# EAGLE board InkTime_2D-PCB (EAGLE 9.7.0)
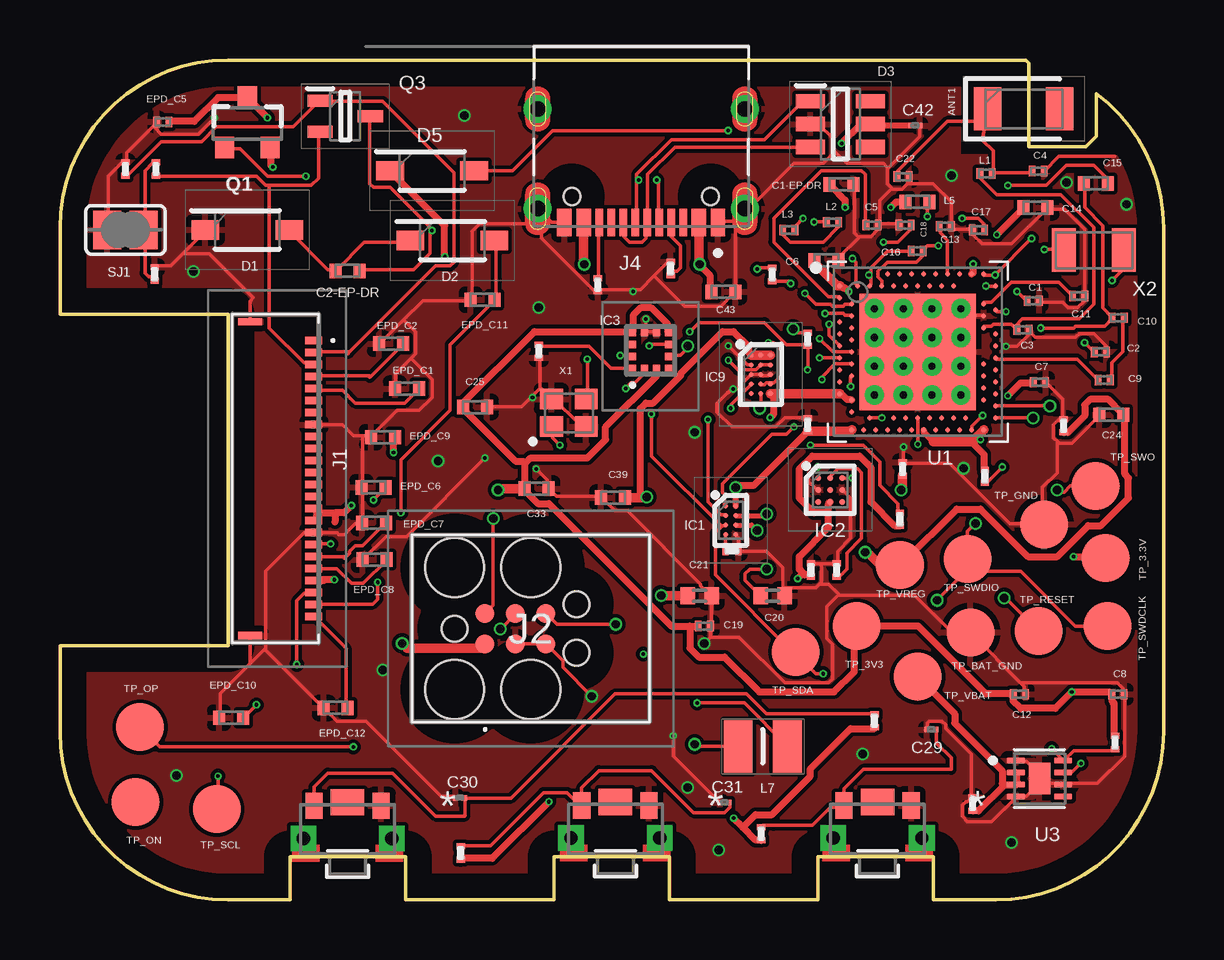
[diagram p0: board, top side]
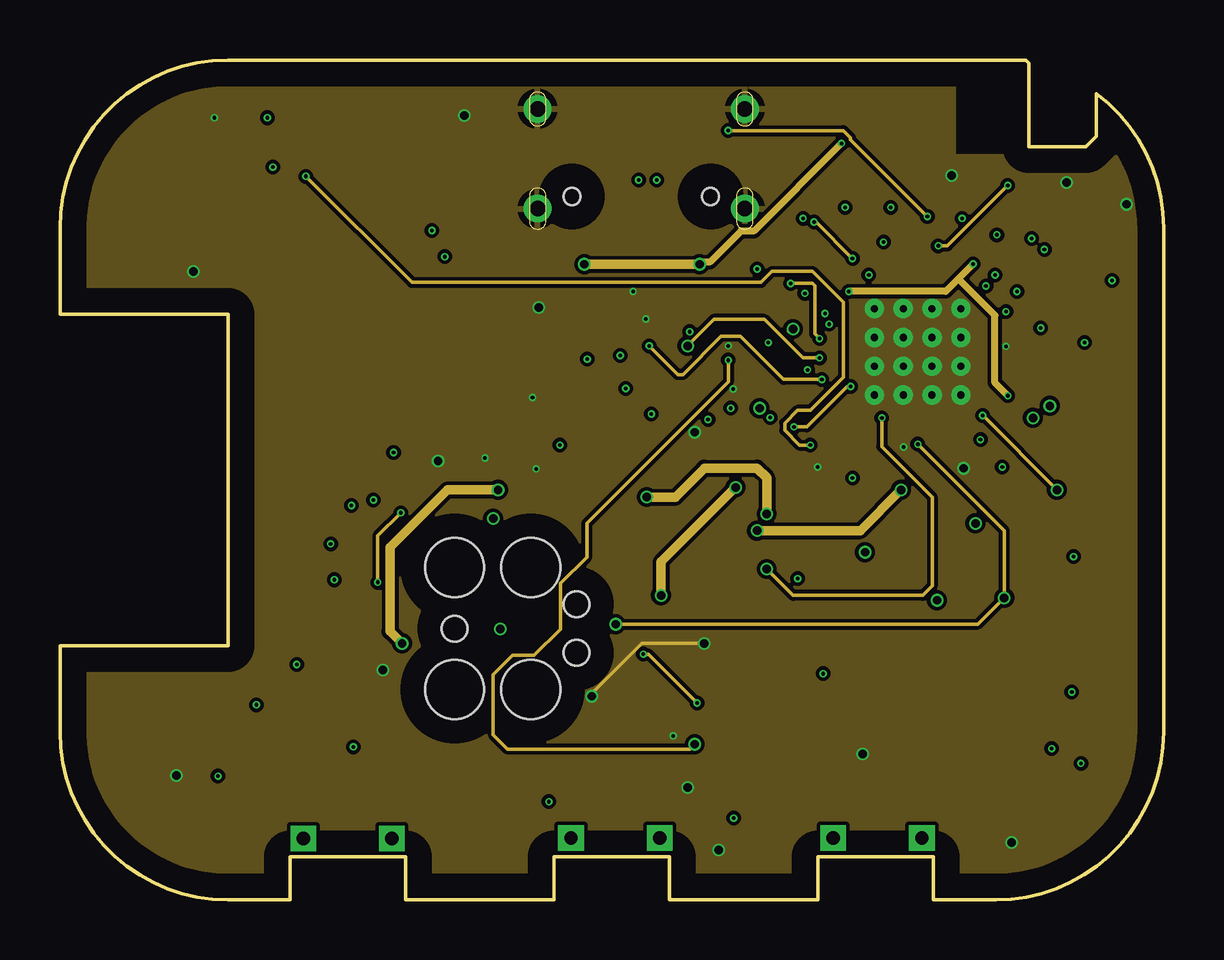
[diagram p1: board, inner layer Route2]
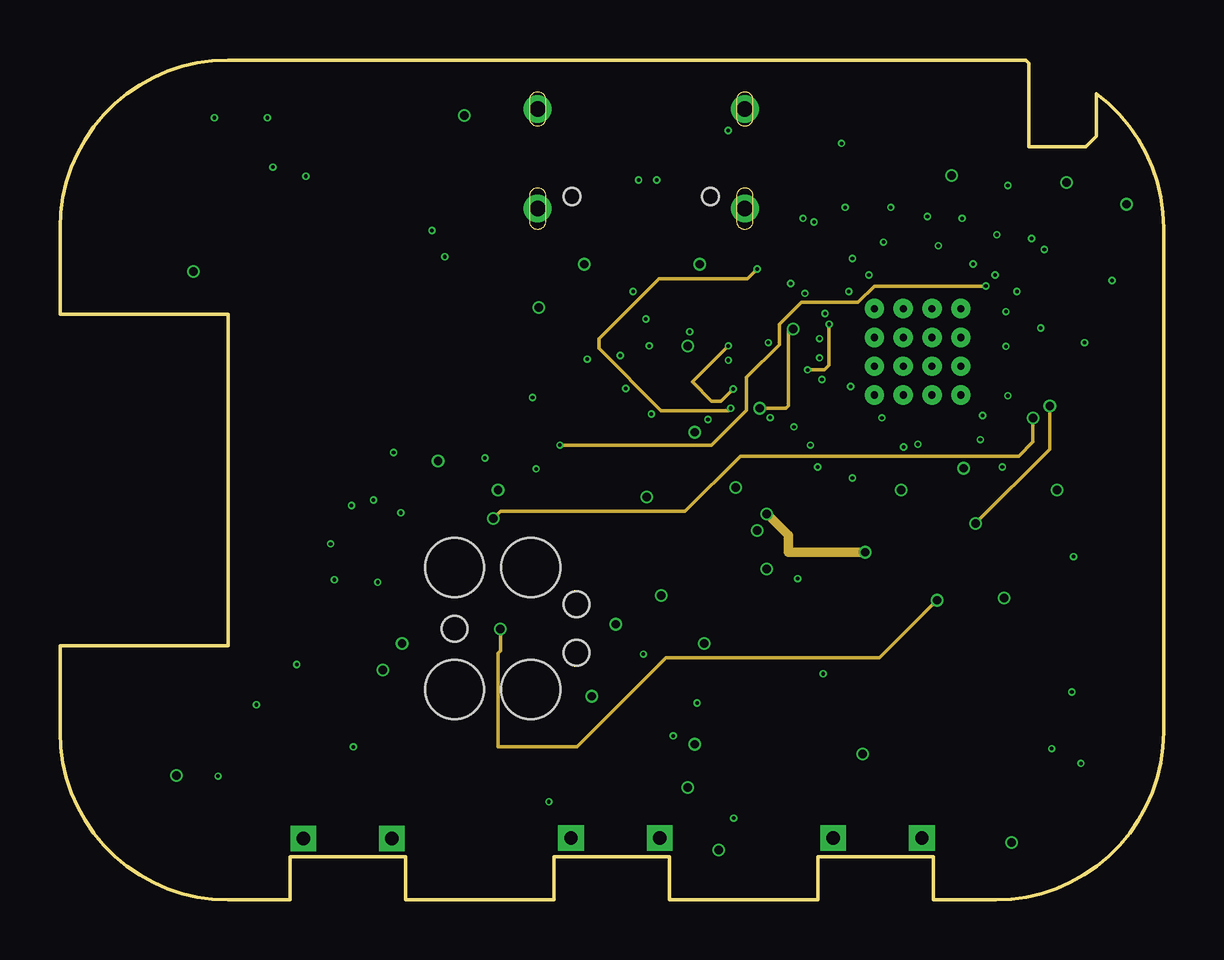
[diagram p2: board, inner layer Route15]
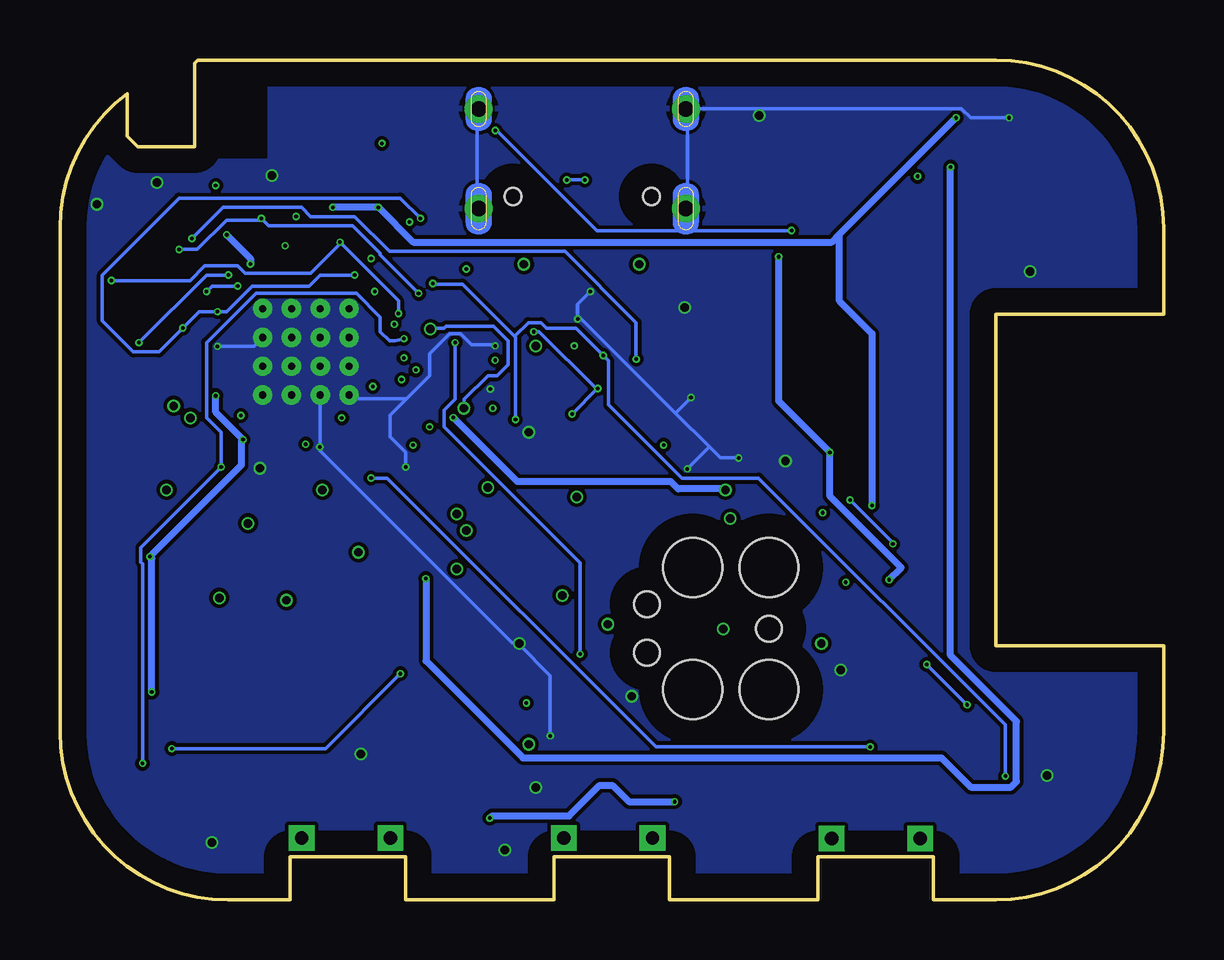
[diagram p3: board, bottom side, seen from below]

Size 46 x 35 mm. Coordinates in mm from the lower left corner, seen from the top.
Outline: 39,0 36.4,0 36.4,1.8 31.6,1.8 31.6,0 25.4,0 25.4,1.8 20.6,1.8 20.6,0 14.4,0 14.4,1.8 9.6,1.8 9.6,0 7,0 arc-90 0,7 0,10.6 7,10.6 7,24.4 0,24.4 0,28 arc-90 7,35 40.25,35 40.39,34.86 40.39,31.39 42.76,31.39 43.2,31.83 43.2,33.6 arc-53 46,28 46,7 arc-90 39,0
Copper layers (1+2*15+16): Top 0.035mm / dielectric 1.5mm / Route2 0.035mm / dielectric 0.15mm / Route15 0.035mm / dielectric 0.2mm / Bottom 0.035mm
Design rules "Fusion Electronics Design Rules *": minimum track width 6mil, minimum drill 0.15mm, track to track 6mil, track to pad 6mil, pad to pad 6mil, via to via 6mil, smd to smd 6mil, copper to edge 40mil, drill to drill 6mil, minimum pad ring 10mil, minimum via ring 0.075mm, stop-mask expansion 4mil, vias tented up to drill 9999mil, thermal gap 10mil
Net classes: 0 default: width 0.15 mm; 1 Putere: width 0.3 mm

## Footprints (pad centres in the part's own frame; a part is rotated, then mirrored left to right if it is on the bottom)
2450AT18B100E_ANTC3216X140N = smd 1.15 x 1.8: 1 -1.5,0; 2 1.5,0
NORDIC_NRF_3_RESC0201_L = smd 0.28 x 0.43: 1 -0.255,0; 2 0.255,0
NORDIC_NRF_3_RESC0402_L = smd 0.5 x 0.6: 1 -0.5,0; 2 0.5,0
PERFECT_0402_0402 = smd 0.6 x 0.7: 1 -0.5,0; 2 0.5,0
GRM011R60J152KE01L_1_0201 = smd 0.35 x 0.25: 1 0,0.275; 2 0,-0.275
GRM011R60J152KE01L_2_CAPC0201X13N = smd 0.22 x 0.23: 1 -0.185,0; 2 0.185,0
ESP32_C6_LIBRARY_5_SOD3716X135N = smd 1.15 x 0.8: 1 -1.75,0; 2 1.75,0
ESP32_C6_LIBRARY_3_SOT95P280X145-6N = smd 1.2 x 0.6: 1 -1.25,0.95; 2 -1.25,0; 3 -1.25,-0.95; 4 1.25,-0.95; 5 1.25,0; 6 1.25,0.95
BQ25180YBGR_BGA8C40P2X4_100X155X50 = smd 0.2 x 0.2: A1 -0.2,0.6; A2 0.2,0.6; B1 -0.2,0.2; B2 0.2,0.2; C1 -0.2,-0.2; C2 0.2,-0.2; D1 -0.2,-0.6; D2 0.2,-0.6
DRV2605YZFR_BGA9C50P3X3_144X144X62 = smd 0.25 x 0.25: A1 -0.5,0.5; A2 0,0.5; A3 0.5,0.5; B1 -0.5,0; B2 0,0; B3 0.5,0; C1 -0.5,-0.5; C2 0,-0.5; C3 0.5,-0.5
BMA423_BMA423 = smd 0.3 x 0.35: 1 -0.75,-0.775; 2 -0.25,-0.775; 3 0.25,-0.775; 4 0.75,-0.775; 7 0.75,0.775; 8 0.25,0.775; 9 -0.25,0.775; 10 -0.75,0.775 | smd 0.35 x 0.3: 5 0.775,-0.25; 6 0.775,0.25; 11 -0.775,0.25; 12 -0.775,-0.25
RT6160AWSC_BGA15C40P3X5_140X230X60 = smd 0.216 x 0.216: A1 -0.4,0.8; A2 0,0.8; A3 0.4,0.8; B1 -0.4,0.4; B2 0,0.4; B3 0.4,0.4; C1 -0.4,0; C2 0,0; C3 0.4,0; D1 -0.4,-0.4; D2 0,-0.4; D3 0.4,-0.4; E1 -0.4,-0.8; E2 0,-0.8; E3 0.4,-0.8
503480-2400_5034802400 = smd 0.3 x 0.7: 1 -5.75,1.525; 2 -5.25,1.525; 3 -4.75,1.525; 4 -4.25,1.525; 5 -3.75,1.525; 6 -3.25,1.525; 7 -2.75,1.525; 8 -2.25,1.525; 9 -1.75,1.525; 10 -1.25,1.525; 11 -0.75,1.525; 12 -0.25,1.525; 13 0.25,1.525; 14 0.75,1.525; 15 1.25,1.525; 16 1.75,1.525; 17 2.25,1.525; 18 2.75,1.525; 19 3.25,1.525; 20 3.75,1.525; 21 4.25,1.525; 22 4.75,1.525; 23 5.25,1.525; 24 5.75,1.525 | smd 0.3 x 1: MP1 -6.54,-1.125; MP2 6.54,-1.125
TC2030-IDC_TC2030IDC = smd 0.783 x 0.783: 1 -0.953,-0.635; 2 -0.953,0.635; 3 0.317,-0.635; 4 0.317,0.635; 5 1.588,-0.635; 6 1.588,0.635 | hole 2.451: -2.223,-2.54; -2.223,2.54; 0.952,-2.54; 0.952,2.54 | hole 1.067: -2.223,0; 2.857,-1.016; 2.857,1.016
KH-TYPE-C-16P_KINGHELM_KH-TYPE-C-16P = smd 0.6 x 1.15: A1_B12 -3.2,4.725; A4_B9 -2.4,4.725; A9_B4 2.4,4.725; A12_B1 3.2,4.725 | smd 0.3 x 1.15: A5 -1.25,4.725; A6 -0.25,4.725; A7 0.25,4.725; A8 1.25,4.725; B5 1.75,4.725; B6 0.75,4.725; B7 -0.75,4.725; B8 -1.75,4.725 | drill 0.65 pad 1.05: SH1 -4.32,0; SH2 4.32,0; SH3 -4.32,4.15; SH4 4.32,4.15 | hole 0.7: -2.89,3.65; 2.89,3.65
NORDIC_NRF_2_RESC0201_L = smd 0.28 x 0.43: 1 -0.255,0; 2 0.255,0
NORDIC_NRF_2_RESC0402_L = smd 0.5 x 0.6: 1 -0.5,0; 2 0.5,0
MLP2016SR47MT0S1_INDC2016X100N = smd 1.2 x 2.2: 1 -1.028,0; 2 1.028,0
ESP32_C6_LIBRARY_4_ESP32_C6_LIBRARY_4_ESP32_C6_LIBRARY_4_ESP32_C6_LIBRARY_4_ESP32_WROVER_SPARKFUN-DISCRETESEMI_SOT23-3 = smd 0.8 x 0.9: 1 -0.95,-1; 2 0.95,-1; 3 0,1.1
ESP32_C6_LIBRARY_6_SOT65P210X110-3N = smd 1.05 x 0.5: 1 -1.05,0.65; 2 -1.05,-0.65; 3 1.05,0
ERA-1AEB3401C_0201 = smd 0.35 x 0.25: 1 0,0.275; 2 0,-0.275
CPF0201D7K68C1_0201 = smd 0.35 x 0.25: 1 0,0.275; 2 0,-0.275
ESP32_C6_LIBRARY_7_JUMPER_SJ = smd 1.168 x 1.6: 1 -0.762,0; 2 0.762,0
2025-10-22_07-23-44_LIBRARY_SW_EVP-AKE31A_PAN = smd 0.711 x 1.092: 1 -1.4,-0.972; 2 1.4,-0.972 | drill 0.559 pad 0.914 square: 3 -1.848,0.381; 4 1.848,0.381 | smd 1.397 x 1.092: 5 0,-1.124
HECTOR_WATCH_1_TP20R = smd 2 x 2: TP 0,0
NORDIC_NRF_4_AQFN50P700X700X85_HS-74N = smd 4.85 x 4.85: P$74 0,0 | drill 0.3 pad 0.6: P$75 -1.8,1.8; P$76 -0.6,1.8; P$77 0.6,1.8; P$78 1.8,1.8; P$79 -1.8,0.6; P$80 -0.6,0.6; P$81 0.6,0.6; P$82 1.8,0.6; P$83 -1.8,-0.6; P$84 -0.6,-0.6; P$85 0.6,-0.6; P$86 1.8,-0.6; P$87 -1.8,-1.8; P$88 -0.6,-1.8; P$89 0.6,-1.8; P$90 1.8,-1.8 | smd 0.2 x 0.2: P$A8 -1.25,3.25; P$A10 -0.75,3.25; P$A12 -0.25,3.25; P$A14 0.25,3.25; P$A16 0.75,3.25; P$A18 1.25,3.25; P$A20 1.75,3.25; P$A22 2.25,3.25; P$A23 2.75,3.25; P$AA24 3.25,-2.25; P$AB2 -2.75,-2.5; P$AC5 -2,-2.75; P$AC9 -1,-2.75; P$AC11 -0.5,-2.75; P$AC13 0,-2.75; P$AC15 0.5,-2.75; P$AC17 1,-2.75; P$AC19 1.5,-2.75; P$AC21 2,-2.75; P$AC24 3.25,-2.75; P$AD2 -2.75,-3.25; P$AD4 -2.25,-3.25; P$AD6 -1.75,-3.25; P$AD8 -1.25,-3.25; P$AD10 -0.75,-3.25; P$AD12 -0.25,-3.25; P$AD14 0.25,-3.25; P$AD16 0.75,-3.25; P$AD18 1.25,-3.25; P$AD20 1.75,-3.25; P$AD22 2.25,-3.25; P$AD23 2.75,-3.25; P$B1 -3.25,2.75; P$B3 -2.5,2.75; P$B5 -2,2.75; P$B7 -1.5,2.75; P$B9 -1,2.75; P$B11 -0.5,2.75; P$B13 0,2.75; P$B15 0.5,2.75; P$B17 1,2.75; P$B19 1.5,2.75; P$B24 3.25,2.75; P$C1 -3.25,2.25; P$D2 -2.75,2; P$D23 2.75,2; P$E24 3.25,1.75; P$F2 -2.75,1.5; P$F23 2.75,1.5; P$G1 -3.25,1.25; P$H2 -2.75,1; P$H23 2.75,1; P$J1 -3.25,0.75; P$J24 3.25,0.75; P$K2 -2.75,0.5; P$L1 -3.25,0.25; P$L24 3.25,0.25; P$M2 -2.75,0; P$N1 -3.25,-0.25; P$N24 3.25,-0.25; P$P2 -2.75,-0.5; P$P23 2.75,-0.5; P$R1 -3.25,-0.75; P$R24 3.25,-0.75; P$T2 -2.75,-1; P$T23 2.75,-1; P$U1 -3.25,-1.25; P$U24 3.25,-1.25; P$V23 2.75,-1.5; P$W1 -3.25,-1.75; P$W24 3.25,-1.75; P$Y2 -2.75,-2; P$Y23 2.75,-2
ESP32_C6_LIBRARY_SON50P200X200X80-9N = smd 0.76 x 0.27: 1 -0.985,0.75; 2 -0.985,0.25; 3 -0.985,-0.25; 4 -0.985,-0.75; 5 0.985,-0.75; 6 0.985,-0.25; 7 0.985,0.25; 8 0.985,0.75 | smd 0.9 x 1.3: 9 0,0
NORDIC_NRF_BT-XTAL_2016_N = smd 0.95 x 0.85: 1 -0.725,-0.575; 2 0.725,-0.575; 3 0.725,0.575; 4 -0.725,0.575
NORDIC_NRF_1_XTAL_3215_N = smd 1 x 1.8: 1 -1.25,0; 2 1.25,0

## Placement (x,y rotation side)
ANT1  2450AT18B100E  [2450AT18B100E_ANTC3216X140N]  40.17,32.97 0 top
C1  12pF  [NORDIC_NRF_3_RESC0201_L]  40.57,24.97 0 top
C1-EP-DR  10uF  [NORDIC_NRF_3_RESC0402_L]  32.57,29.82 0 top
C2  12pF  [NORDIC_NRF_3_RESC0201_L]  43.37,22.84 0 top
C2-EP-DR  4.7uF/25V  [NORDIC_NRF_3_RESC0402_L]  11.98,26.21 0 top
C3  1pF  [NORDIC_NRF_3_RESC0201_L]  40.14,23.76 0 top
C4  1pF  [NORDIC_NRF_3_RESC0201_L]  40.77,30.37 0 top
C5  100nF  [NORDIC_NRF_3_RESC0201_L]  33.85,28.12 0 top
C6  4.7uF  [NORDIC_NRF_3_RESC0402_L]  31.94,26.65 0 top
C7  100nF  [NORDIC_NRF_3_RESC0201_L]  40.83,21.57 0 top
C8  100nF  [NORDIC_NRF_3_RESC0201_L]  44.1,8.57 0 top
C9  820pF  [NORDIC_NRF_3_RESC0201_L]  43.53,21.67 0 top
C10  N.C.  [NORDIC_NRF_3_RESC0201_L]  44.11,24.26 0 top
C11  100pF  [NORDIC_NRF_3_RESC0201_L]  42.46,25.17 0 top
C12  100nF  [NORDIC_NRF_3_RESC0201_L]  39.99,8.57 0 top
C13  N.C.  [NORDIC_NRF_3_RESC0201_L]  36.9,28.07 0 top
C14  4.7uF  [NORDIC_NRF_3_RESC0402_L]  40.67,28.85 0 top
C15  1.0uF  [NORDIC_NRF_3_RESC0402_L]  43.17,29.86 0 top
C16  47nF  [NORDIC_NRF_3_RESC0201_L]  35.73,27.04 0 top
C17  12pF  [NORDIC_NRF_3_RESC0201_L]  38.29,27.92 0 top
C18  12pF  [NORDIC_NRF_3_RESC0201_L]  35.22,28.12 0 top
C19  100nF  [NORDIC_NRF_3_RESC0201_L]  26.86,11.41 0 top
C20  4.7uF  [PERFECT_0402_0402]  29.7,12.68 0 top
C21  4.7uF  [PERFECT_0402_0402]  26.66,12.68 0 top
C22  N.C.  [NORDIC_NRF_3_RESC0201_L]  35.14,30.14 0 top
C23  0.1uF  [GRM011R60J152KE01L_1_0201]  41.83,19.76 0 top
C24  10uF  [NORDIC_NRF_3_RESC0402_L]  43.83,20.22 0 top
C25  22uF  [NORDIC_NRF_3_RESC0402_L]  17.3,20.54 0 top
C27  0.1uF  [GRM011R60J152KE01L_1_0201]  38.04,4 0 top
C29  1uF  [GRM011R60J152KE01L_2_CAPC0201X13N]  36.32,7.1 0 top
C30  1uF  [GRM011R60J152KE01L_2_CAPC0201X13N]  16.67,4.26 0 top
C31  1uF  [GRM011R60J152KE01L_2_CAPC0201X13N]  27.7,4.06 0 top
C32  1uF  [GRM011R60J152KE01L_1_0201]  32.37,13.75 0 top
C33  22uF  [NORDIC_NRF_3_RESC0402_L]  19.86,17.14 0 top
C34  0.1uF  [GRM011R60J152KE01L_1_0201]  31.3,13.75 0 top
C37  1uF  [GRM011R60J152KE01L_1_0201]  35.12,17.96 0 top
C38  1uF  [GRM011R60J152KE01L_1_0201]  31.17,19.8 0 top
C39  10uF  [NORDIC_NRF_3_RESC0402_L]  23.06,16.77 0 top
C42  0.1uF  [GRM011R60J152KE01L_2_CAPC0201X13N]  35.65,32.27 0 top
C43  4.7uF\  [NORDIC_NRF_3_RESC0402_L]  27.65,25.34 0 top
D1  MBR0530  [ESP32_C6_LIBRARY_5_SOD3716X135N]  7.81,27.92 0 top
D2  ESP32_C6_LIBRARY_5_MBR0530  [ESP32_C6_LIBRARY_5_SOD3716X135N]  16.36,27.48 0 top
D3  USBLC6-2SC6Y  [ESP32_C6_LIBRARY_3_SOT95P280X145-6N]  32.53,32.33 0 top
D5  ESP32_C6_LIBRARY_5_MBR0530  [ESP32_C6_LIBRARY_5_SOD3716X135N]  15.51,30.38 0 top
EPD_C1  1uF/50V  [NORDIC_NRF_3_RESC0402_L]  14.46,21.31 0 top
EPD_C2  1uF/50V  [NORDIC_NRF_3_RESC0402_L]  13.8,23.18 0 top
EPD_C5  0.1uF/50V  [NORDIC_NRF_3_RESC0201_L]  4.29,32.42 0 top
EPD_C6  1uF/50V  [NORDIC_NRF_3_RESC0402_L]  13.07,17.19 0 top
EPD_C7  1uF/50V  [NORDIC_NRF_3_RESC0402_L]  13.1,15.71 0 top
EPD_C8  1uF/50V  [NORDIC_NRF_3_RESC0402_L]  13.12,14.18 0 top
EPD_C9  1uF/50V  [NORDIC_NRF_3_RESC0402_L]  13.46,19.28 0 top
EPD_C10  1uF/50V  [NORDIC_NRF_3_RESC0402_L]  7.13,7.59 0 top
EPD_C11  1uF/50V  [NORDIC_NRF_3_RESC0402_L]  17.62,25.01 0 top
EPD_C12  1uF/50V  [NORDIC_NRF_3_RESC0402_L]  11.49,8 0 top
IC1  BQ25180YBGR  [BQ25180YBGR_BGA8C40P2X4_100X155X50]  27.96,15.82 0 top
IC2  DRV2605YZFR  [DRV2605YZFR_BGA9C50P3X3_144X144X62]  32.1,17.09 0 top
IC3  BMA421  [BMA423_BMA423]  24.62,22.9 0 top
IC9  RT6160AWSC  [RT6160AWSC_BGA15C40P3X5_140X230X60]  29.21,21.9 0 top
J1  503480-2400  [503480-2400_5034802400]  9.05,17.56 270 top
J2  TC2030-IDC  [TC2030-IDC_TC2030IDC]  18.67,11.31 0 top
J4  KH-TYPE-C-16P  [KH-TYPE-C-16P_KINGHELM_KH-TYPE-C-16P]  24.23,32.96 180 top
L1  3.9nH  [NORDIC_NRF_2_RESC0201_L]  38.6,30.27 0 top
L2  10uH  [NORDIC_NRF_2_RESC0201_L]  32.2,28.24 0 top
L3  15nH  [NORDIC_NRF_2_RESC0201_L]  30.38,27.92 0 top
L5  68uH  [NORDIC_NRF_2_RESC0402_L]  35.73,29.09 0 top
L7  FTC252012SR47MBCA  [MLP2016SR47MT0S1_INDC2016X100N]  29.3,6.4 0 top
Q1  20V/4.2A/52mΩ/1.4W  [ESP32_C6_LIBRARY_4_ESP32_C6_LIBRARY_4_ESP32_C6_LIBRARY_4_ESP32_C6_LIBRARY_4_ESP32_WROVER_SPARKFUN-DISCRETESEMI_SOT23-3]  7.81,32.36 0 top
Q3  ESP32_C6_LIBRARY_6_SI1308EDL-T1-GE3  [ESP32_C6_LIBRARY_6_SOT65P210X110-3N]  11.89,32.66 0 top
R1  0  [ERA-1AEB3401C_0201]  31.17,23.37 0 top
R1_EP_DR  0.47  [CPF0201D7K68C1_0201]  4,30.46 0 top
R1_USB  5K1  [CPF0201D7K68C1_0201]  25.45,26.31 0 top
R2_EP_DR  10k  [CPF0201D7K68C1_0201]  2.73,30.46 0 top
R2_USB  5K1  [CPF0201D7K68C1_0201]  22.42,25.63 0 top
R3  0  [ERA-1AEB3401C_0201]  19.96,22.86 0 top
R4  0  [ERA-1AEB3401C_0201]  29.69,26.06 0 top
R5  10k  [CPF0201D7K68C1_0201]  33.95,7.47 0 top
R7  10k  [CPF0201D7K68C1_0201]  29.23,2.76 0 top
R8  10k  [CPF0201D7K68C1_0201]  16.7,1.96 0 top
R9  10K  [ERA-1AEB3401C_0201]  28.01,14.54 270 top
R17  3k3  [ERA-1AEB3401C_0201]  38.55,17.66 0 top
R18  3K3  [ERA-1AEB3401C_0201]  43.98,6.56 0 top
R_PWR_EPD  10K  [CPF0201D7K68C1_0201]  35.01,15.86 0 top
R_TYPE_SEL  2.2  [CPF0201D7K68C1_0201]  3.95,26.08 0 top
SJ1  [ESP32_C6_LIBRARY_7_JUMPER_SJ]  2.73,27.92 0 top
SW_DN  2025-10-22_07-23-44_LIBRARY_EVP-AKE31ASW_EVP-AKE31A_PAN  [2025-10-22_07-23-44_LIBRARY_SW_EVP-AKE31A_PAN]  34.08,2.96 180 top
SW_ENT  2025-10-22_07-23-44_LIBRARY_EVP-AKE31ASW_EVP-AKE31A_PAN  [2025-10-22_07-23-44_LIBRARY_SW_EVP-AKE31A_PAN]  23.15,2.96 180 top
SW_UP  2025-10-22_07-23-44_LIBRARY_EVP-AKE31ASW_EVP-AKE31A_PAN  [2025-10-22_07-23-44_LIBRARY_SW_EVP-AKE31A_PAN]  11.99,2.95 180 top
TP_3.3V  HECTOR_WATCH_1_TPTP20R  [HECTOR_WATCH_1_TP20R]  43.59,14.25 0 top
TP_3V3  HECTOR_WATCH_1_TPTP20R  [HECTOR_WATCH_1_TP20R]  33.21,11.41 0 top
TP_BAT_GND  HECTOR_WATCH_1_TPTP20R  [HECTOR_WATCH_1_TP20R]  37.95,11.15 0 top
TP_GND  HECTOR_WATCH_1_TPTP20R  [HECTOR_WATCH_1_TP20R]  41.03,15.65 0 top
TP_ON  HECTOR_WATCH_1_TPTP20R  [HECTOR_WATCH_1_TP20R]  3.15,4.08 0 top
TP_OP  HECTOR_WATCH_1_TPTP20R  [HECTOR_WATCH_1_TP20R]  3.34,7.2 0 top
TP_RESET  HECTOR_WATCH_1_TPTP20R  [HECTOR_WATCH_1_TP20R]  40.79,11.21 0 top
TP_SCL  HECTOR_WATCH_1_TPTP20R  [HECTOR_WATCH_1_TP20R]  6.54,3.79 0 top
TP_SDA  HECTOR_WATCH_1_TPTP20R  [HECTOR_WATCH_1_TP20R]  30.67,10.34 0 top
TP_SWDCLK  HECTOR_WATCH_1_TPTP20R  [HECTOR_WATCH_1_TP20R]  43.67,11.41 0 top
TP_SWDIO  HECTOR_WATCH_1_TPTP20R  [HECTOR_WATCH_1_TP20R]  37.83,14.21 0 top
TP_SWO  HECTOR_WATCH_1_TPTP20R  [HECTOR_WATCH_1_TP20R]  43.17,17.25 0 top
TP_VBAT  HECTOR_WATCH_1_TPTP20R  [HECTOR_WATCH_1_TP20R]  35.75,9.31 0 top
TP_VREG  HECTOR_WATCH_1_TPTP20R  [HECTOR_WATCH_1_TP20R]  35.01,13.95 0 top
U1  NRF52840_QF  [NORDIC_NRF_4_AQFN50P700X700X85_HS-74N]  35.75,22.84 0 top
U3  MAX17048G+T10  [ESP32_C6_LIBRARY_SON50P200X200X80-9N]  40.83,5.06 0 top
X1  32MHz  [NORDIC_NRF_BT-XTAL_2016_N]  21.21,20.3 0 top
X2  32.768kHz  [NORDIC_NRF_1_XTAL_3215_N]  43.1,27.08 0 top

## Library data of the parts
ANT1 = InkTime_v5; ARROW_PART_NUMBER: 2450AT18B100E; ARROW_PRICE-STOCK: https://www.arrow.com/en/products/2450at18b100e/johanson-dielectrics?utm_currency=USD&region=nac; DESCRIPTION: Antennas 2.45GHz ANTENNA; HEIGHT: 1.4mm; MANUFACTURER_NAME: JOHANSON TECHNOLOGY; MANUFACTURER_PART_NUMBER: 2450AT18B100E; MOUSER_PART_NUMBER: 609-2450AT18B100E; MOUSER_PRICE-STOCK: https://www.mouser.co.uk/ProductDetail/Johanson-Technology/2450AT18B100E?qs=yCnrNFeXz%252Bh5MFsFIXGZGA%3D%3D
C1 C1-EP-DR C2 C2-EP-DR C3-C25 C27 C32-C34 C37-C39 C43 EPD_C1 EPD_C2 EPD_C5-EPD_C12 L1-L3 L5 R1 R1_EP_DR R1_USB R2_EP_DR R2_USB R3-R5 R7-R9 R17 R18 R_TYPE_SEL SJ1 TP_3.3V TP_3V3 TP_BAT_GND TP_GND TP_ON TP_OP TP_RESET TP_SCL TP_SDA TP_SWDCLK TP_SWDIO TP_SWO TP_VBAT TP_VREG U1 X1 X2 = InkTime_v5
C29-C31 C42 = InkTime_v5; AVAILABILITY: In Stock; CHECK_PRICES: https://www.snapeda.com/parts/GRM011R60J152KE01L/Murata/view-part/?ref=eda; DESCRIPTION: SMD Capacitor X5R(EIA) with Capacitance: 1500pF Tol. 10%. Rated Voltage: 6.3Vdc; MF: Murata; MP: GRM011R60J152KE01L; PACKAGE: 0201 Murata; PRICE: None; SNAPEDA_LINK: https://www.snapeda.com/parts/GRM011R60J152KE01L/Murata/view-part/?ref=snap
D1 D2 D5 = InkTime_v5; AVAILABILITY: In Stock; CHECK_PRICES: https://www.snapeda.com/parts/MBR0530/Onsemi/view-part/?ref=eda; DESCRIPTION: Diode Schottky 30 V 500mA Surface Mount SOD-123; MF: ON Semiconductor; MP: MBR0530; PACKAGE: SOD-123-2 ON Semiconductor; PRICE: None; PURCHASE-URL: https://www.snapeda.com/api/url_track_click_mouser/?unipart_id=179458&manufacturer=ON Semiconductor&part_name=MBR0530&search_term=None; SNAPEDA_LINK: https://www.snapeda.com/parts/MBR0530/Onsemi/view-part/?ref=snap
D3 = InkTime_v5; AVAILABILITY: In Stock; CHECK_PRICES: https://www.snapeda.com/parts/USBLC6-2SC6Y/STMicroelectronics/view-part/?ref=eda; DESCRIPTION: 17V Clamp 5A (8/20µs) Ipp Tvs Diode Surface Mount SOT-23-6; MF: STMicroelectronics; MP: USBLC6-2SC6Y; PACKAGE: SOT-23-6 STMicroelectronics; PRICE: None; SNAPEDA_LINK: https://www.snapeda.com/parts/USBLC6-2SC6Y/STMicroelectronics/view-part/?ref=snap
IC1 = InkTime_v5; ARROW_PART_NUMBER: BQ25180YBGR; ARROW_PRICE-STOCK: https://www.arrow.com/en/products/bq25180ybgr/texas-instruments?utm_currency=USD&region=nac; DESCRIPTION: Charger IC Lithium Ion/Polymer, Lithium Iron Phosphate 8-DSBGA (1.6x1.1); HEIGHT: 0.5mm; MANUFACTURER_NAME: Texas Instruments; MANUFACTURER_PART_NUMBER: BQ25180YBGR; MOUSER_PART_NUMBER: 595-BQ25180YBGR; MOUSER_PRICE-STOCK: https://www.mouser.co.uk/ProductDetail/Texas-Instruments/BQ25180YBGR?qs=doiCPypUmgEWjAK%252BJAX6Tw%3D%3D
IC2 = InkTime_v5; ARROW_PART_NUMBER: DRV2605YZFR; ARROW_PRICE-STOCK: https://www.arrow.com/en/products/drv2605yzfr/texas-instruments?region=nac; DESCRIPTION: Haptic Driver for ERM/LRA with Built-In Library and Smart Loop Architecture; HEIGHT: 0.625mm; MANUFACTURER_NAME: Texas Instruments; MANUFACTURER_PART_NUMBER: DRV2605YZFR
IC3 = InkTime_v5; ARROW_PART_NUMBER: BMA423; ARROW_PRICE-STOCK: https://www.arrow.com/en/products/bma423/bosch; DESCRIPTION: Accelerometers Triaxial low-g 12bit Acceleration Sensor; HEIGHT: 1mm; MANUFACTURER_NAME: BOSCH; MANUFACTURER_PART_NUMBER: BMA423; MOUSER_PART_NUMBER: 262-BMA423; MOUSER_PRICE-STOCK: https://www.mouser.co.uk/ProductDetail/Bosch-Sensortec/BMA423?qs=HXFqYaX1Q2xC%252BSgeGoX3mg%3D%3D
IC9 = InkTime_v5; DESCRIPTION: Buck-Boost Regulator Positive Output Step-Up/Step-Down I2C DC-DC Controller IC 15-WL-CSP (BSC) (1.4x2.3); HEIGHT: 0.6mm; MANUFACTURER_NAME: RICHTEK; MANUFACTURER_PART_NUMBER: RT6160AWSC; MOUSER_PART_NUMBER: 835-RT6160AWSC; MOUSER_PRICE-STOCK: https://www.mouser.co.uk/ProductDetail/Richtek/RT6160AWSC?qs=amGC7iS6iy%2FLd9PSoixZXQ%3D%3D
J1 = InkTime_v5; DESCRIPTION: FFC & FPC Connectors 0.5mm FPC RA SMT Dual Contact 24Ckt; HEIGHT: 1.87mm; MANUFACTURER_NAME: Molex; MANUFACTURER_PART_NUMBER: 503480-2400; MOUSER_PART_NUMBER: 538-503480-2400; MOUSER_PRICE-STOCK: https://www.mouser.co.uk/ProductDetail/Molex/503480-2400?qs=OAhjpuo3Vu7efIoxFh9AOw%3D%3D
J2 = InkTime_v5; DESCRIPTION: CABLE ADAPTER 6 POS; HEIGHT: 19mm; MANUFACTURER_NAME: Tag Connect; MANUFACTURER_PART_NUMBER: TC2030-IDC
J4 = InkTime_v5; AVAILABILITY: Not in stock; CHECK_PRICES: https://www.snapeda.com/parts/KH-TYPE-C-16P/Kinghelm/view-part/?ref=eda; MF: kinghelm; MP: KH-TYPE-C-16P; PACKAGE: None; PRICE: None; SNAPEDA_LINK: https://www.snapeda.com/parts/KH-TYPE-C-16P/Kinghelm/view-part/?ref=snap
L7 = InkTime_v5; DESCRIPTION: SMD / SMT Inductors (Coils), L=0.47?H, L x W x T :; HEIGHT: 1mm; JLCPCB: https://jlcpcb.com/partdetail/6763488-FTC252012SR47MBCA/C5832368; MANUFACTURER_NAME: TDK; MANUFACTURER_PART_NUMBER: FTC252012SR47MBCA
Q1 = Libraria_DANI; PROD_ID: TRAN-14388
Q3 = InkTime_v5; AVAILABILITY: In Stock; CHECK_PRICES: https://www.snapeda.com/parts/SI1308EDL-T1-GE3/Vishay+Siliconix/view-part/?ref=eda; DESCRIPTION: Si1308EDL-T1-GE3 N-channel MOSFET Transistor, 1.5 A, 30 V, 3-Pin SC-70 | Siliconix / Vishay SI1308EDL-T1-GE3; MF: Vishay Siliconix; MP: SI1308EDL-T1-GE3; PACKAGE: SOT-323 Vishay Semiconductor; PRICE: None; PURCHASE-URL: https://www.snapeda.com/api/url_track_click_mouser/?unipart_id=274603&manufacturer=Vishay Siliconix&part_name=SI1308EDL-T1-GE3&search_term=None; SNAPEDA_LINK: https://www.snapeda.com/parts/SI1308EDL-T1-GE3/Vishay+Siliconix/view-part/?ref=snap
R_PWR_EPD = Libraria_DANI
SW_DN SW_ENT SW_UP = InkTime_v5; COPYRIGHT: Copyright (C) 2025 Ultra Librarian. All rights reserved.; DIGI-KEY_PART_NUMBER_1: P123437TR-ND; DIGI-KEY_PART_NUMBER_2: P123437CT-ND; DIGI-KEY_PART_NUMBER_3: P123437DKR-ND; MANUFACTURER_NAME: Panasonic; MANUFACTURER_PART_NUMBER: EVP-AKE31A
U3 = InkTime_v5; AVAILABILITY: In Stock; CHECK_PRICES: https://www.snapeda.com/parts/MAX17048G+T10/Analog+Devices/view-part/?ref=eda; DESCRIPTION: 3µA 1-Cell/2-Cell Fuel Gauge with ModelGauge; MF: Analog Devices; MP: MAX17048G+T10; PACKAGE: TDFN-8 Maxim; PRICE: None; PURCHASE-URL: https://www.snapeda.com/api/url_track_click_mouser/?unipart_id=329239&manufacturer=Analog Devices&part_name=MAX17048G+T10&search_term=None; SNAPEDA_LINK: https://www.snapeda.com/parts/MAX17048G+T10/Analog+Devices/view-part/?ref=snap

## Nets
3V3/1.7D [Putere]: C34.2 IC2.C2 Q1.2 R_PWR_EPD.2
3V3/1.7D1 [Putere]: R5.2 R7.2 R8.2
3V3/2.4A [Putere]: C6.1 C7.1 C8.1 C12.1 C14.1 C19.1 C25.1 C33.1 IC3.3 IC3.7 IC3.10 IC9.E3 J2.1 R17.1 R18.1 TP_3.3V.TP TP_3V3.TP U1.P$A22 U1.P$AD14 U1.P$AD23 U1.P$B1 U1.P$W1 U1.P$Y2
ALERT/1.6C: U3.5
ALERT/2.5C: U1.P$J24
D+/1.5D: D3.4
D+/2.7D: U1.P$AD6
D-/1.5D: D3.6
D-/2.7D: U1.P$AD4
DEC1: C5.1 U1.P$C1
DEC3: C11.1 U1.P$D23
DEC4_6: C10.1 C15.1 C16.1 L3.2 U1.P$B5 U1.P$E24
DN: D3.1 J4.A7 J4.B7
DP: D3.3 J4.A6 J4.B6
EPD_3V3 [Putere]: C1-EP-DR.1 EPD_C5.2 J1.15 J1.16 L5.1 Q1.3
EPD_BUSY/1.5D: J1.9
EPD_BUSY/2.2D: U1.P$AD12
EPD_CS/1.4C: J1.12
EPD_CS/2.2D: U1.P$K2
EPD_DC/1.5D: J1.11
EPD_DC/2.2D: U1.P$AD10
EPD_RST/1.5D: J1.10
EPD_RST/2.2D: U1.P$AC11
GDR: J1.2 Q3.1 R2_EP_DR.2
GND: C1-EP-DR.2 C1.2 C2.2 C3.2 C4.2 C5.2 C6.2 C7.2 C8.2 C11.2 C12.2 C13.2 C14.2 C17.1 C18.1 C19.2 C20.2 C21.2 C22.2 C23.1 C24.1 C25.2 C27.1 C29.1 C30.1 C31.1 C32.1 C33.2 C34.1 C37.1 C38.1 C39.1 C42.2 C43.2 D1.1 D3.2 EPD_C1.1 EPD_C2.1 EPD_C5.1 EPD_C6.1 EPD_C7.1 EPD_C8.1 EPD_C9.1 EPD_C10.1 EPD_C11.1 EPD_C12.1 IC1.D2 IC2.B1 IC2.B3 IC3.8 IC3.9 IC9.B1 IC9.C1 IC9.C2 IC9.C3 J1.8 J1.17 J1.MP1 J1.MP2 J2.3 J2.5 J4.A1_B12 J4.A12_B1 J4.SH1 J4.SH2 J4.SH3 J4.SH4 R1_USB.1 R2_EP_DR.1 R2_USB.2 R3.2 R9.1 R_TYPE_SEL.1 SJ1.1 SW_DN.1 SW_ENT.1 SW_UP.1 TP_BAT_GND.TP TP_GND.TP U1.P$74 U1.P$75 U1.P$76 U1.P$77 U1.P$78 U1.P$79 U1.P$80 U1.P$81 U1.P$82 U1.P$83 U1.P$84 U1.P$85 U1.P$86 U1.P$87 U1.P$88 U1.P$89 U1.P$90 U1.P$F23 U3.1 U3.4 U3.6 U3.9 X1.2 X1.4
HAPTIC_EN/1.4C: IC2.A1
HAPTIC_EN/2.6A: U1.P$U1
IMU_INT1: IC3.5 U1.P$N1
IMU_INT2: IC3.6 U1.P$P2
LX1: IC9.B2 IC9.B3 L7.1
LX2: IC9.D2 IC9.D3 L7.2
MOSI/1.5B: J1.14
MOSI/2.2D: U1.P$B13
N$1: C20.1 U1.P$AC5
N$2: C9.1 U1.P$N24
N$3: C13.1 U1.P$A18
N$4: L2.2 L3.1
N$5: C15.2 C16.2 U1.P$B7
N$6: L2.1 U1.P$B3
N$7: C3.1 L1.1 U1.P$H23
N$8: C2.1 U1.P$A23 X1.3
N$9: C1.1 U1.P$B24 X1.1
N$10: EPD_C2.2 J1.4
N$11: IC9.D1 R4.1
N$12: EPD_C10.2 J1.22
N$13: IC9.E2 R1.1
N$14: EPD_C1.2 J1.5
N$15: IC1.D1 R9.2
N$16: IC3.1 R3.1
N$17: EPD_C6.2 J1.18
N$20: EPD_C7.2 J1.19
N$21: EPD_C12.2 J1.24
N$22: EPD_C8.2 J1.20
N$23: C32.2 IC2.A2
N$25: C2-EP-DR.2 D5.2 L5.2 Q3.3
N$27: C2-EP-DR.1 D1.2 D2.1
N$28: R1_EP_DR.1 R_TYPE_SEL.2 SJ1.2
N$30: J4.A5 R1_USB.2
N$31: J4.B5 R2_USB.1
N.C.: C9.2 C10.2
OUT: IC2.C3
OUT+: IC2.A3 TP_OP.TP
OUT-: TP_ON.TP
P0.00/XL1: C17.2 U1.P$D2 X2.1
P0.01/XL2: C18.2 U1.P$F2 X2.2
P0.04: U1.P$J1
P0.09: U1.P$L24
P0.13/1.5D: C30.2 R5.1 SW_UP.2
P0.13/2.6C: U1.P$AD8
P0.14/1.5D: C31.2 R8.1 SW_ENT.2
P0.14/2.7C: U1.P$AC9
P0.19: U1.P$AC15
P0.20: U1.P$AD16
P0.21: U1.P$AC17
P0.22: U1.P$AD18
P0.23: U1.P$AC19
P0.24: U1.P$AD20
P0.25: U1.P$AC21
P0.26: U1.P$G1
P0.27: U1.P$H2
P0.28: U1.P$B11
P0.29: U1.P$A10
P0.30: U1.P$B9
P0.31: U1.P$A8
P1.01/1.6C: Q1.1 R_PWR_EPD.1
P1.01/2.4B: U1.P$Y23
P1.02/1.6C: C29.2 R7.1 SW_DN.2
P1.02/2.8C: U1.P$W24
P1.03: U1.P$V23
P1.04: U1.P$U24
P1.05: U1.P$T23
P1.06: U1.P$R24
P1.07: U1.P$P23
P1.09: U1.P$R1
P1.10: U1.P$A20
P1.11: U1.P$B19
P1.12: U1.P$B17
P1.13: U1.P$A16
P1.14: U1.P$B15
P1.15: U1.P$A14
PMIC_INT: IC1.A1 U1.P$T2
PREVGH [Putere]: D5.1 EPD_C9.2 J1.21
PREVGL: D2.2 EPD_C11.2 J1.23
RESE: J1.3 Q3.2 R1_EP_DR.2
RESET: J2.6 TP_RESET.TP U1.P$AC13
RF: ANT1.1 C4.1 C22.1 L1.2
SCK/1.5B: J1.13
SCK/2.2D: U1.P$A12
SCL/1.4C: IC2.C1
SCL/2.4C: IC1.B1 IC3.12 R4.2 R17.2 TP_SCL.TP U1.P$M2 U3.7
SDA/1.4C: IC2.B2
SDA/2.4C: IC1.C1 IC3.2 R1.2 R18.2 TP_SDA.TP U1.P$L1 U3.8
SWDCLK: J2.4 TP_SWDCLK.TP TP_SWDIO.TP U1.P$AA24
SWDIO: J2.2 U1.P$AC24
SWO: TP_SWO.TP U1.P$AD22
VBAT/1.2A [Putere]: C27.2 TP_VBAT.TP U3.2 U3.3
VBAT/2.5C [Putere]: C37.2 IC1.C2
VBUS/1.5D [Putere]: C42.1 C43.1 D3.5 J4.A4_B9 J4.A9_B4
VBUS/2.6D [Putere]: C21.1 C38.2 IC1.A2 U1.P$AD2
VREG [Putere]: C23.2 C24.2 C39.2 IC1.B2 IC9.A1 IC9.A2 IC9.A3 TP_VREG.TP

## Tracks (layer width: path | path; a pad name or v marks a point on that pad's centre or on a via)
3V3/1.7D  (via drill 0.15)
  Top 0.3: 32.04,16.13 32.04,15.52 30.82,14.31 30.82,13.77 30.97,13.62 | 32.04,16.13 32.04,16.52 IC2.C2 | 30.97,13.62 31.05,13.54 31.28,13.54 C34.2 | 32.04,16.13 31.43,16.13 30.82,16.74 30.82,17.96 31.36,18.5 33.34,18.5 33.79,18.04 33.79,16.59 34.78,15.6 34.94,15.6 R_PWR_EPD.2 | v8.88,30.54 8.8,30.61 8.8,31.3 Q1.2 | 30.97,13.62 v30.75,13.39
  Bottom 0.3: v8.88,30.54 8.88,10.19 6.13,7.45 6.13,4.93 6.36,4.7 8.04,4.7 9.26,5.92 26.71,5.92 30.75,9.96 v30.75,13.39
3V3/1.7D1  (via drill 0.15)
  Top 0.3: v20.38,4.09 18.02,1.73 16.72,1.73 R8.2 | 28.46,3.03 28.99,2.49 29.22,2.49 R7.2 | 28.46,3.03 v28.08,3.41 | 28.46,3.03 28.99,3.56 29.68,3.56 31.28,5.16 31.28,5.47 32.96,7.14 33.95,7.14 R5.2
  Bottom 0.3: v20.38,4.09 22.29,4.09 22.97,4.78 23.51,4.78 24.78,3.51 27.98,3.51 v28.08,3.41
3V3/2.4A  (via drill 0.15, 0.35)
  Top 0.254: 36.4,19.09 36,19.49 U1.P$AD14
  Top 0.3: v38.06,26.5 38.06,26.12 U1.P$A22 | v39.05,27.72 40.12,28.78 C14.1 | v32.88,25.36 32.73,25.51 32.65,25.51 U1.P$B1 | R17.1 38.52,17.96 38.52,18.57 38.14,18.95 38,19.09 | v39.51,21.01 40.04,21.55 40.5,21.55 C7.1 | v38.37,19.18 38.23,19.32 | v42.25,14.31 43.55,14.31 TP_3.3V.TP | R18.1 43.93,6.84 43.93,8.21 43.85,8.29 43.85,8.51 C8.1 43.75,8.67 v42.18,8.67 41.49,7.98 40.04,7.98 39.74,8.29 39.74,8.51 C12.1 39.58,8.59 38.59,8.59 35.77,11.41 TP_3V3.TP 33.11,11.33 33.11,9.5 32.27,8.67 29.15,8.67 27.7,10.11 26.63,10.11 26.25,10.5 26.25,11.41 | IC3.7 25.34,23.68 25.34,23.98 24.65,24.67 24.19,24.67 23.89,24.36 23.89,23.68 IC3.10 23.74,23.68 19.77,23.68 16.72,20.63 C25.1 16.8,20.48 19.01,18.27 19.32,18.27 19.39,18.19 | U1.P$Y2 32.96,20.86 32.8,20.86 32.65,21.01 U1.P$W1 | 19.39,18.19 19.62,18.42 21.98,18.42 22.74,19.18 22.74,19.72 24.88,21.85 24.88,22.08 IC3.3 | 19.39,18.19 19.39,17.28 C33.1 19.47,16.97 19.93,16.52 20.38,16.52 25.49,11.41 26.25,11.41 | 26.25,11.41 C19.1 | 29.76,21.1 29.76,20.25 v29.6,20.1
  Top 0.4: J2.1 17.53,10.49 14.46,10.49 v14.26,10.69 | C33.1 18.31,17.14 v18.26,17.09 | U1.P$B1 32.4,25.59 31.44,26.55 C6.1 | 36.4,19.09 38,19.09 38.23,19.32 U1.P$AD23 | IC9.E3 29.76,21.1 U1.P$W1
  Route2 0.3: v32.88,25.36 36.92,25.36 37.45,25.89 | v38.06,26.5 37.45,25.89 | 37.45,25.89 38.98,24.36 38.98,21.55 v39.51,21.01
  Route2 0.4: v14.26,10.69 13.76,11.19 13.76,14.69 16.16,17.09 v18.26,17.09
  Bottom 0.3: v38.06,26.5 38.06,26.73 v39.05,27.72 | v39.51,21.01 39.51,20.33 v38.37,19.18 38.44,19.11 38.44,18.12 v42.25,14.31 42.18,14.23 v42.18,8.67 | v29.6,20.1 26.94,17.43 20.53,17.43 20.23,17.12 18.33,17.12 v18.26,17.09
DEC1
  Top 0.152: U1.P$C1 32.5,25.13 32.04,25.13 29.76,27.41 29.76,28.4 31.74,30.38 33.41,30.38 33.57,30.23 33.57,28.17 C5.1
DEC3
  Top 0.152: U1.P$D23 38.52,24.9 38.82,24.9 39.66,25.74 41.64,25.74 42.18,25.2 C11.1
DEC4_6  (via drill 0.15)
  Top 0.152: 33.79,26.04 33.79,26.34 34.48,27.03 C16.1 | 33.79,26.04 33.79,25.66 U1.P$B5 | v39.43,24.52 39.05,24.52 U1.P$E24 | v40.88,23.83 42.25,23.83 42.33,23.91 43.55,23.91 43.85,24.21 C10.1 43.85,24.29 43.47,24.67 43.47,28.1 42.71,28.86 42.71,29.8 C15.1 | v30.97,28.4 30.67,28.1 30.67,27.95 L3.2 | v33.72,26.04 33.79,26.04
  Bottom 0.152: v30.97,28.4 31.81,29.24 41.03,29.24 44.23,26.04 44.23,24.14 42.94,22.84 41.87,22.84 v40.88,23.83 40.19,24.52 v39.43,24.52 39.05,24.52 37.98,25.58 35.62,25.58 35.17,26.04 v33.72,26.04
DN  (via drill 0.15)
  Top 0.152: 24.04,30 24.04,30.23 25.49,31.68 29.38,31.68 30.97,33.28 D3.1 | 24.04,30 24.04,28.25 J4.A7 | v24.88,30 24.95,29.93 24.95,28.25 J4.B7 | 24.04,30 v24.12,30
  Bottom 0.152: v24.12,30 v24.88,30
DP
  Top 0.152: J4.B6 23.51,28.17 23.51,27.64 23.74,27.41 24.27,27.41 24.42,27.56 24.42,28.17 J4.A6 24.5,28.25 24.5,30.23 25.64,31.37 D3.3
EPD_3V3  (via drill 0.15)
  Top 0.3: EPD_C5.2 4.61,32.44 5.6,32.44 6.59,33.43 7.81,33.43 Q1.3 7.89,33.36 v8.65,32.59 | 11.47,16.13 11.47,15.75 | J1.15 10.66,16.22 10.78,16.13 | v34.63,28.86 34.86,29.09 35.17,29.09 L5.1 | v32.73,28.86 32.73,29.17 32.12,29.77 C1-EP-DR.1 | v12.15,16.44 11.85,16.13 11.47,16.13 | 10.78,16.13 11.47,16.13 | 10.78,16.13 10.71,16.06 10.71,15.91 10.63,15.83 J1.16
  Bottom 0.3: v34.63,28.86 v32.73,28.86 31.28,27.41 13.83,27.41 13.5,27.74 | v12.15,16.44 12.15,23.6 13.5,24.95 13.5,27.74 | 13.5,27.74 v8.65,32.59
GDR
  Top 0.152: R2_EP_DR.2 2.78,30.23 2.86,30.23 4.23,31.6 5.9,31.6 6.51,32.21 9.71,32.21 10.78,33.28 Q3.1 10.86,33.28 13.45,33.28 16.42,30.31 16.42,26.57 16.27,26.42 15.66,26.42 12.04,22.8 | 12.04,22.8 12,22.76 | J1.2 10.63,22.84 12,22.84 12.04,22.8
GND  (via drill 0.15, 0.35)
  Top 0.152: J2.3 J2.5 20.96,9.97 20.96,9.69 v22.16,8.49 | J4.A1_B12 27.48,28.29 28.16,28.29 | 28.16,28.29 28.36,28.29 28.38,28.33 28.38,28.55 28.61,28.78 J4.SH3 28.69,28.78 30.59,30.69 31.81,30.69 32.31,31.18 | J4.A12_B1 20.48,28.23 J4.SH4 20.08,28.55 20.08,28.17 | IC9.B1 28.65,22.3 v27.86,23.09 | 27.11,10.94 C19.2 27.16,11.41 27.16,12.63 C21.2 27.09,12.7 26.71,13.09 26.71,13.16 23.66,16.21 23.13,16.21 22.59,16.74 C39.1 22.52,16.82 20.69,16.82 20.38,17.12 C33.2 20.31,17.2 20.31,17.51 v19.85,17.96 | 27.11,10.94 v26.86,10.69 | IC1.D2 28.28,15.09 R9.1 28.31,14.53 29.45,14.53 30.14,13.85 30.14,13.01 | C7.2 41.11,21.55 41.8,20.86 41.8,20.1 C23.1 41.72,20.1 41.41,19.79 41.41,19.26 41.6,19.07 | 41.6,19.07 41.64,19.03 42.18,19.03 43.32,20.17 C24.1 | 41.6,19.07 41.57,19.03 41.57,17.81 40.96,17.2 40.96,15.75 TP_GND.TP 40.96,15.68 39.58,15.68 37.07,18.19 35.17,18.19 C37.1 35.17,18.27 v35.17,18.88 | C38.1 31.13,20.1 30.21,20.1 29.83,19.72 28,19.72 27.39,20.33 27.39,20.71 27.81,21.13 v28.06,21.29 28.2,21.29 IC9.C1 IC9.C2 29.22,21.85 29.53,21.85 29.6,21.93 IC9.C3 | v31.58,18.04 31.51,18.04 31.2,17.73 31.2,17.43 31.51,17.12 31.58,17.12 IC2.B1 | C2.2 43.62,23.07 43.09,23.6 42.48,23.6 42.33,23.45 40.65,23.45 40.42,23.68 40.42,23.75 C3.2 40.42,23.6 39.89,23.07 v39.43,23.07 | U1.P$F23 38.44,24.36 37.83,24.36 37.6,24.59 U1.P$74 | 34.02,21.09 35.09,21.09 U1.P$88 | U1.P$83 34.02,22.23 34.56,21.7 U1.P$74 | U1.P$84 35.17,22.23 U1.P$74 | 36.38,22.23 36.38,21.09 U1.P$89 36.46,21.09 37.53,21.09 U1.P$90 | 36.38,22.23 U1.P$85 36.46,22.23 37.53,22.23 U1.P$86 | 36.38,22.23 U1.P$74
  Top 0.152: U1.P$79 34.02,23.45 35.09,23.45 U1.P$74 | U1.P$80 35.17,23.45 U1.P$74 | U1.P$81 36.38,23.45 U1.P$74 | U1.P$75 34.02,24.67 35.09,24.67 U1.P$74 | 36.99,23.98 37.53,23.45 U1.P$82 | U1.P$76 35.17,24.67 U1.P$74 | 36.99,23.98 36.38,24.59 U1.P$77 | 36.99,23.98 U1.P$74 | U1.P$78 37.6,24.67 U1.P$74 | 34.02,21.09 U1.P$87 | 34.02,21.09 U1.P$74 | C31.1 27.47,4.09 25.56,6 v25.56,6.84 | U3.9 41.03,4.86 41.8,4.86 U3.6 41.87,4.86 43.24,4.86 44.39,6 44.39,8.51 C8.2 44.31,8.59 44.31,8.82 44.08,9.05 40.12,9.05 40.08,9.01 | U3.1 39.89,5.77 40.27,5.77 40.8,5.24 40.8,5.08 U3.9 | U3.9 40.88,4.93 40.27,4.32 39.89,4.32 U3.4 39.81,4.25 38.82,3.26 37.83,3.26 37.6,3.48 37.6,3.94 37.76,4.09 37.83,4.09 37.98,4.25 C27.1 37.98,4.32 37.98,6.08 36.92,7.14 36.92,7.3 36.77,7.45 36.23,7.45 36.16,7.37 36.16,7.14 C29.1 36.08,7.07 | 30.14,13.01 30.14,12.7 C20.2 30.14,13.01 | IC2.B3 32.65,17.05 32.96,16.74 32.96,15.07 32.42,14.53 32.42,14.08 C32.1 32.35,14 31.74,14 | 31.74,14 31.36,14 C34.1 | 30.14,13.01 31.51,13.01 31.7,13.2 | 31.7,13.2 31.74,13.24 31.74,14 | 40.08,9.01 37.98,11.1 TP_BAT_GND.TP 37.91,11.18 37.15,11.18 35.62,12.7 32.5,12.7 32.46,12.74 | 40.08,9.01 40.19,8.89 40.19,8.59 C12.2 | 32.46,12.74 32.04,13.16 31.74,13.16 31.7,13.2 | 32.46,12.74 31.97,12.25 31.97,10.88 32.19,10.65 32.19,9.2 32.04,9.05 30.21,9.05 28.31,10.95 27.16,10.95 27.11,10.94 | 8.53,10.46 7.93,9.85 | 7.93,9.85 6.67,8.59 6.67,7.6 EPD_C10.1 | C30.1 16.42,4.32 15.89,4.32 12.76,7.45 11.54,7.45 11.01,7.98 EPD_C12.1 10.93,8.06 8.53,10.46 | 5.12,26.93 6.06,27.87 D1.1 | 5.12,26.93 4.61,26.42 4,26.42 R_TYPE_SEL.1 | 12.61,19.33 12.23,19.33 11.77,19.79 10.63,19.79 J1.8
  Top 0.152: 12.61,19.33 12.91,19.33 EPD_C9.1 12.99,19.33 14.06,20.4 14.97,20.4 15.51,20.93 15.51,21.7 14.63,22.57 | 12.61,19.33 12.61,17.2 EPD_C6.1 12.61,17.12 12.61,15.75 EPD_C7.1 12.53,15.68 12.31,15.68 11.85,15.22 11.62,15.22 11.54,15.3 10.63,15.3 J1.17 10.55,15.3 10.17,15.3 8.57,13.7 8.57,10.5 8.53,10.46 | 14.32,24.17 15.12,24.97 17.11,24.97 EPD_C11.1 17.18,25.05 17.18,27.87 17.49,28.17 20.08,28.17 | 14.32,24.17 13.37,23.22 EPD_C2.1 | 14.63,22.57 14.82,22.76 14.82,23.68 14.32,24.17 | 14.63,22.57 13.98,21.93 13.98,21.32 EPD_C1.1 | C1.2 40.88,24.9 41.8,24.9 42.02,24.67 42.41,24.67 42.71,24.97 42.71,25.13 C11.2 42.71,25.2 42.71,27.95 41.87,28.78 41.19,28.78 C14.2 41.11,28.78 39.66,27.34 38.44,27.34 38.06,27.72 38.06,27.87 C17.1 37.98,27.95 37.3,27.95 37.22,28.02 C13.2 37.15,28.1 37.15,29.09 36.38,29.85 35.39,29.85 35.36,29.89 | C5.2 34.17,28.17 34.94,28.17 C18.1 | 33.3,27.6 33.34,27.64 33.79,27.64 34.1,27.95 34.1,28.1 C5.2 | 33.3,27.6 32.5,26.8 32.5,26.65 C6.2 | 33.3,27.6 33.11,27.79 33.11,29.77 C1-EP-DR.2 | 34.52,30.5 34.48,30.46 34.48,29.85 34.67,29.66 | 34.52,30.5 35.85,31.83 35.85,32.21 C42.2 | 34.67,29.66 34.71,29.62 35.09,29.62 35.36,29.89 | 35.36,29.89 35.39,29.93 35.39,30.08 C22.2 | 40.96,30.38 C4.2 41.64,30.99 43.96,30.99 | 32.31,31.18 32.8,30.69 34.33,30.69 34.52,30.5 | 32.31,31.18 32.19,31.3 32.19,31.75 31.66,32.29 31.36,32.29 D3.2 | 34.67,29.66 34.17,29.17 34.17,28.25 C5.2 | SJ1.1 2.02,27.95 2.02,30.15 2.55,30.69 2.7,30.69 R2_EP_DR.1 2.78,30.77 2.78,31.15 4,32.36 EPD_C5.1 3.92,32.21 4.23,31.91 5.75,31.91 v6.44,32.59 | 28.16,28.29 28.16,25.36 C43.2 28.08,25.28 27.55,24.74 26.02,24.74 24.77,26
  Top 0.152: 20.04,21.35 20.46,20.93 X1.4 20.53,20.93 21.68,19.79 21.91,19.79 X1.2 | 20.04,21.35 20,21.39 20,22.53 R3.2 | 20.04,21.35 19.66,20.97 | 19.66,20.97 19.24,20.55 17.87,20.55 C25.2 | IC3.8 24.8,23.68 24.42,23.68 IC3.9 24.42,23.75 v24.42,24.21 | 23.89,25.43 24.19,25.43 24.77,26 | 23.89,25.43 22.44,25.43 R2_USB.2 22.36,25.43 22.21,25.43 20.08,27.56 20.08,28.17 | 24.77,26 25.41,26.65 R1_USB.1 | 23.89,25.43 v23.89,25.36 | v17.72,18.42 14.44,15.14 13.6,15.14 12.69,14.23 EPD_C8.1 | v19.7,20.93 19.66,20.97 | 24.57,3.94 SW_ENT.1 | 35.47,3.94 SW_DN.1 | J1.MP2 7.93,9.85 | SW_UP.1 13.39,4.32 | 5.12,26.93 6.22,26.93 8.06,25.09 7.93,24.96 J1.MP1
  Route2 0.152: v22.16,8.49 22.16,8.59 24.26,10.69 v26.86,10.69
  Route15 0.152: v27.86,23.09 26.36,21.59 27.16,20.79 27.56,20.79 v28.06,21.29
  Bottom 0.152: v31.58,18.04 31.58,18.65 32.24,19.31 32.24,20.2 31.56,20.89 | 33.95,21.01 U1.P$87 33.8,20.89 31.56,20.89 | 31.56,20.89 30.59,21.85 30.59,22.76 29.76,23.6 29.3,23.6 28.84,23.14 27.93,23.14 v27.86,23.09 | v39.43,23.07 37.91,23.07 37.6,23.37 U1.P$82 | U1.P$88 35.17,21.01 v35.17,18.88 35.17,18.73 27.16,10.72 26.86,10.72 v26.86,10.69 26.86,10.65 25.56,9.35 v25.56,6.84 | J4.SH3 28.61,28.86 28.61,32.9 J4.SH1 | J4.SH4 19.85,28.86 19.85,32.9 J4.SH2 19.85,32.98 8.42,32.98 8.04,32.59 v6.44,32.59 | 24.42,24.36 24.42,24.82 v23.89,25.36 | 24.42,24.36 v24.42,24.21 | v17.72,18.42 18.48,18.42 18.94,18.88 | 24.42,24.36 20.34,20.29 | 20.34,20.29 18.94,18.88 | 20.34,20.29 v19.7,20.93 | 18.94,18.88 v19.85,17.96
  other vias: 5.56,26.19 44.46,28.99 13.46,9.59 26.46,19.49 19.96,24.69 41.96,29.89 37.16,30.19 37.66,17.99 39.66,2.39 33.46,6.09 26.16,4.69 16.86,32.69 15.76,18.29 4.86,5.19 27.46,2.09
  pour Top: 43.5,31.03 43.48,31.01 37.54,31.01 37.52,31.03 37.5,31.05 37.48,31.07 37.48,35.86 36.13,37.21 -3.61,37.21 -4.46,36.36 -4.46,-0.74 -4.46,-0.73 45.83,-0.73 46.68,0.12 46.68,33.26 45.23,34.71 43.34,34.71 43.52,34.53 43.54,34.51 43.54,31.07 43.52,31.05
  pour Route2: 43.4,31.03 43.38,31.01 37.34,31.01 37.32,31.03 37.3,31.05 37.28,31.07 37.28,35.86 35.43,37.71 -5.41,37.71 -6.76,36.36 -6.76,-1.33 -6.18,-0.75 -6.16,-0.73 47.73,-0.73 47.88,-0.58 47.88,34.46 47.03,35.31 43.89,35.31 43.54,34.96 43.54,31.17 43.52,31.15
  pour Bottom: 43.7,30.83 43.68,30.81 37.34,30.81 37.32,30.83 37.3,30.85 37.28,30.87 37.28,35.46 35.73,37.01 -7.01,37.01 -7.56,36.46 -7.56,-1.68 -7.01,-2.23 43.13,-2.23 47.48,2.12 47.48,34.21 43.79,34.21 43.67,34.09 43.82,33.93 43.84,33.91 43.84,30.97 43.82,30.95
IMU_INT1  (via drill 0.15, 0.35)
  Top 0.152: U1.P$N1 v31.66,22.59 | IC3.5 25.44,22.69 25.86,22.69 26.16,22.99 v26.16,23.09
  Route2 0.152: v31.66,22.59 30.96,22.59 29.36,24.19 27.26,24.19 v26.16,23.09
IMU_INT2  (via drill 0.15)
  Top 0.152: U1.P$P2 32.31,22.34 31.76,21.79 v31.76,21.69 | IC3.6 24.62,23.15 v24.56,23.09
  Route2 0.152: v31.76,21.69 30.16,21.69 28.36,23.49 27.56,23.49 25.96,21.89 25.76,21.89 v24.56,23.09
LX1  (via drill 0.15, 0.35)
  Top 0.152: IC9.B3 IC9.B2 29,22.09 28.26,22.09 v27.86,22.49 | L7.1 26.55,6.4 v26.46,6.49
  Route2 0.152: v27.86,22.49 27.86,21.59 21.96,15.69 21.96,14.29 20.86,13.19 20.86,11.29 19.76,10.19 18.86,10.19 18.06,9.39 18.06,6.89 18.66,6.29 26.26,6.29 v26.46,6.49
LX2  (via drill 0.15)
  Top 0.152: IC9.D2 29.22,21.47 29.38,21.47 29.45,21.55 29.6,21.55 IC9.D3 29.68,21.55 29.76,21.55 30.06,21.85 30.06,22.92 29.76,23.22 v29.53,23.22 | v26.55,8.21 28.54,8.21 30.29,6.46 L7.2
  Route2 0.152: v24.32,10.24 24.52,10.24 v26.55,8.21
  Bottom 0.152: v29.53,23.22 29.53,20.86 29.98,20.4 29.98,19.72 24.32,14.05 v24.32,10.24
N$1  (via drill 0.15, 0.35)
  Top 0.152: U1.P$AC5 v34.26,20.09 | C20.1 28.56,13.32 28.56,13.59 28.76,13.79 v29.46,13.79
  Route2 0.152: v34.26,20.09 34.26,18.89 36.36,16.79 36.36,13.09 35.96,12.69 30.56,12.69 v29.46,13.79
N$2
  Top 0.152: U1.P$N24 39.05,22.53 42.41,22.53 43.24,21.7 C9.1
N$3
  Top 0.152: U1.P$A18 36.99,26.12 36.99,27.49 36.69,27.79 36.69,28.02 C13.1
N$4
  Top 0.152: L3.1 30.14,27.87 30.14,27.72 30.44,27.41 31.81,27.41 32.42,28.02 32.42,28.17 L2.2
N$5  (via drill 0.15)
  Top 0.152: U1.P$B7 34.25,25.66 34.25,25.81 34.1,25.96 34.1,26.19 34.48,26.57 35.7,26.57 35.93,26.8 35.93,27.03 C16.2 36,27.11 36.16,27.26 v36.61,27.26 | v39.51,29.77 41.11,29.77 41.95,30.61 43.09,30.61 43.55,30.15 C15.2
  Route2 0.152: v39.51,29.77 36.99,27.26 v36.61,27.26
N$6  (via drill 0.15)
  Top 0.152: v33.03,26.73 33.19,26.57 33.19,25.66 U1.P$B3 | v31.43,28.25 31.89,28.25 L2.1
  Route2 0.152: v33.03,26.73 31.51,28.25 v31.43,28.25
N$7
  Top 0.152: U1.P$H23 38.52,23.91 38.82,23.91 38.9,23.98 39.66,23.98 39.81,23.83 C3.1 39.81,23.91 40.12,24.21 42.48,24.21 43.09,24.82 43.09,28.02 41.72,29.39 39.05,29.39 38.37,30.08 38.37,30.23 L1.1
N$8  (via drill 0.15)
  Top 0.152: v42.71,23.22 43.09,22.84 C2.1 | U1.P$A23 38.52,26.04 v38.98,26.04 v40.5,27.56 | v21.98,22.53 21.98,20.93 X1.3
  Bottom 0.152: v38.98,26.04 39.89,26.04 v42.71,23.22 | v21.98,22.53 21.98,24.06 24.95,27.03 32.27,27.03 33.72,28.48 35.55,28.48 35.93,28.86 39.2,28.86 v40.5,27.56
N$9  (via drill 0.15)
  Top 0.152: v38.59,25.58 38.98,25.58 U1.P$B24 | v39.89,25.36 40.27,24.97 C1.1 | v20.84,18.95 20.53,19.26 20.53,19.72 X1.1
  Route15 0.152: v20.84,18.95 27.16,18.95 28.61,20.4 28.61,21.77 29.98,23.14 29.98,23.98 30.9,24.9 33.26,24.9 33.95,25.58 v38.59,25.58
  Bottom 0.152: v38.59,25.58 39.66,25.58 v39.89,25.36
N$10
  Top 0.152: 12.91,21.77 12.95,21.81 | 12.95,21.81 14.29,23.14 EPD_C2.2 | J1.4 10.63,21.85 12.91,21.85 12.95,21.81
N$11  (via drill 0.15)
  Top 0.152: IC9.D1 27.96,20.64 v27.96,20.49 | R4.1 29.1,26.33 v29.06,26.29
  Route15 0.152: v27.96,20.49 27.86,20.39 25.06,20.39 22.46,22.99 22.46,23.39 24.96,25.89 28.66,25.89 v29.06,26.29
N$12  (via drill 0.15)
  Top 0.152: v8.19,8.13 7.66,7.6 EPD_C10.2 | v9.87,9.81 9.87,12.48 10.17,12.78 10.55,12.78 J1.22
  Bottom 0.152: v9.87,9.81 v8.19,8.13
N$13  (via drill 0.35)
  Top 0.152: IC9.E2 29.22,20.55 v29.16,20.49 | R1.1 30.7,23.64 v30.56,23.79
  Route2 0.152: 30.36,23.69 30.46,23.79 v30.56,23.79
  Route15 0.152: v29.16,20.49 30.26,20.49 30.36,20.59 30.36,23.69
  Bottom 0.152: v30.56,23.79 30.52,23.83 29.98,23.83 29.91,23.91 27.93,23.91 27.32,23.3 27.32,22.31 27.77,21.85 28.16,21.85 29.15,20.86 29.15,20.55 v29.16,20.49
N$14
  Top 0.152: EPD_C1.2 14.9,21.24 14.36,20.71 12.31,20.71 11.77,21.24 10.63,21.24 J1.5
N$15
  Top 0.152: R9.2 27.73,15.19 IC1.D1
N$16
  Top 0.152: IC3.1 23.81,22.15 22.97,22.15 22.06,23.07 20,23.07 R3.1
N$17  (via drill 0.15)
  Top 0.152: v13.07,16.67 13.52,17.12 EPD_C6.2 | v11.28,14.84 10.63,14.84 J1.18
  Bottom 0.152: v13.07,16.67 11.28,14.88 v11.28,14.84
N$20
  Top 0.152: 11.85,14.23 11.89,14.27 | 11.89,14.27 12.08,14.46 12.08,14.53 12.31,14.76 12.61,14.76 13.52,15.68 EPD_C7.2 | J1.19 10.63,14.31 11.85,14.31 11.89,14.27
N$21
  Top 0.152: EPD_C12.2 11.92,8.06 11.92,10.5 10.63,11.79 J1.24
N$22
  Top 0.152: 13.6,14.15 13.6,14.16 | 13.6,14.16 EPD_C8.2 | J1.20 11.54,13.81 12.16,13.19 12.64,13.19 13.6,14.16
N$23
  Top 0.152: IC2.A2 32.12,17.66 32.42,17.96 33.26,17.96 33.41,17.81 33.41,15.07 32.8,14.46 32.8,13.77 32.58,13.54 32.42,13.54 C32.2
N$25  (via drill 0.15)
  Top 0.152: 15.43,27.89 15.43,28.02 13.75,29.7 13.07,29.7 12.91,29.85 12.91,32.59 Q3.3 | 15.43,27.89 15.43,26.95 14.74,26.27 12.53,26.27 C2-EP-DR.2 | v36.16,28.48 36.16,29.09 L5.2 | v27.85,32.06 20.53,32.06 18.86,30.38 17.33,30.38 D5.2 | v15.51,27.89 15.43,27.89
  Route2 0.152: v36.16,28.48 32.96,31.68 32.96,31.75 32.65,32.06 v27.85,32.06
  Bottom 0.152: v15.51,27.89 23.61,27.89 27.77,32.06 v27.85,32.06
N$27
  Top 0.152: D1.2 9.56,27.87 11.16,26.27 11.47,26.27 C2-EP-DR.1 11.54,26.27 12.69,27.41 14.59,27.41 D2.1
N$28
  Top 0.152: R_TYPE_SEL.2 3.92,25.81 3.77,25.96 3.69,25.96 3.54,26.12 3.54,27.87 SJ1.2 3.54,27.95 3.54,30.38 3.85,30.69 4,30.69 R1_EP_DR.1
N$30
  Top 0.152: R1_USB.2 25.49,26.04 25.64,26.19 25.72,26.19 25.87,26.34 25.87,27.26 25.49,27.64 25.49,28.17 J4.A5
N$31
  Top 0.152: R2_USB.1 22.44,25.96 22.44,28.17 J4.B5
N.C.
  Top 0.152: C9.2 43.85,21.7 43.85,22.38 44.31,22.84 44.31,24.21 C10.2
OUT+  (via drill 0.15)
  Top 0.152: v33.03,17.58 32.65,17.58 IC2.A3 | v12.23,6.38 4.15,6.38 3.39,7.14 TP_OP.TP
  Bottom 0.152: v33.03,17.58 32.36,17.58 21.16,6.38 v12.23,6.38
P0.00/XL1  (via drill 0.15)
  Top 0.152: v31.05,25.28 31.51,24.82 32.12,24.82 32.19,24.74 32.65,24.74 32.73,24.82 32.96,24.82 U1.P$D2 | v37.6,28.4 38.29,28.4 38.52,28.17 38.52,27.95 C17.2 | v41.03,27.11 41.8,27.11 X2.1
  Bottom 0.152: v31.05,25.28 32.65,26.88 32.65,26.95 33.79,28.1 37.3,28.1 v37.6,28.4 37.6,28.33 39.05,28.33 40.27,27.11 v41.03,27.11
P0.01/XL2  (via drill 0.15)
  Top 0.152: v31.89,24.44 32.65,24.44 32.73,24.36 32.96,24.36 U1.P$F2 | v34.33,27.41 34.94,27.41 35.47,27.95 35.47,28.1 C18.2 | v43.85,25.81 44.31,26.27 44.31,27.03 X2.2
  Bottom 0.152: v31.89,24.44 31.89,24.97 v34.33,27.41 34.33,27.34 35.55,26.12 38.29,26.12 38.59,26.42 39.97,26.42 40.58,25.81 v43.85,25.81
P0.13/1.5D
  Top 0.152: R5.1 29.45,7.75 28.61,8.59 23.14,8.59 18.8,4.25 16.95,4.25 C30.2 16.88,4.25 16.88,3.51 16.86,3.49 15.66,3.49 13.86,5.29 11.16,5.29 10.59,4.72 SW_UP.2
P0.14/1.5D
  Top 0.152: C31.2 27.93,4.02 27.93,3.87 27.7,3.64 26.41,3.64 24.66,5.39 22.46,5.39 21.75,4.68 SW_ENT.2 21.68,3.94 21.14,4.48 20.15,4.48 17.94,2.27 17.18,2.27 16.72,2.27 R8.1
P1.01/1.6C  (via drill 0.15)
  Top 0.152: v31.28,18.95 33.49,18.95 34.17,18.27 34.17,17.28 34.94,16.52 34.94,16.21 R_PWR_EPD.1 | v10.25,30.15 8.65,30.15 7.5,31.3 6.9,31.3 Q1.1
  Route2 0.152: v31.28,18.95 30.82,18.95 30.21,19.56 30.21,19.87 30.75,20.4 31.28,20.4 32.65,21.77 32.65,24.9 31.36,26.19 29.68,26.19 29.22,25.74 14.67,25.74 v10.25,30.15
P1.02/1.6C
  Top 0.152: C29.2 36.54,7.07 36.54,6.53 37.15,5.92 37.15,5.44 33.48,5.44 32.68,4.63 SW_DN.2 32.65,3.87 32.12,3.87 31.36,3.1 29.76,3.1 29.3,3.1 R7.1
PMIC_INT  (via drill 0.15)
  Top 0.152: v30.59,19.72 30.29,19.41 29.68,19.41 27.62,17.35 27.62,16.97 27.7,16.9 27.7,16.44 IC1.A1 | v32.96,21.39 32.96,21.77 U1.P$T2
  Route2 0.152: v30.59,19.72 31.13,19.72 32.8,21.39 v32.96,21.39
PREVGH  (via drill 0.15)
  Top 0.3: v13.91,18.65 13.91,19.26 EPD_C9.2 | v16.04,26.8 16.04,28.1 13.83,30.31 D5.1 | 11.01,13.31 10.63,13.31 | 10.63,13.31 J1.21 | v11.44,13.34 10.71,13.34 10.66,13.29 10.65,13.29 10.63,13.31
  Bottom 0.3: v16.04,26.8 16.04,20.78 v13.91,18.65 13.91,16.82 10.93,13.85 v11.44,13.34
PREVGL  (via drill 0.15)
  Top 0.152: D2.2 18.17,27.41 18.17,25.05 EPD_C11.2 18.1,24.97 16.27,23.14 16.27,20.4 14.21,18.34 v14.21,16.13 | v13.24,13.24 13.24,12.54 13.03,12.32 10.63,12.32 J1.23
  Route2 0.152: v13.24,13.24 13.24,15.17 v14.21,16.13
RESE
  Top 0.152: 8.72,29.77 10.48,29.77 10.78,30.08 10.78,31.98 Q3.2 | 8.72,29.77 8.57,29.77 8.19,30.15 4,30.15 R1_EP_DR.2 | 8.72,29.77 8.72,23.83 10.17,22.38 10.55,22.38 J1.3
RESET  (via drill 0.15, 0.35)
  Top 0.152: J2.6 20.71,11.49 v23.16,11.49 | TP_RESET.TP 39.41,12.59 v39.36,12.59 | U1.P$AC13 v35.75,19 v35.76,18.99
  Route2 0.152: v23.16,11.49 38.26,11.49 v39.36,12.59 39.36,15.39 v35.76,18.99
RF
  Top 0.152: C4.1 40.5,30.31 38.9,30.31 L1.2 38.9,30.38 38.9,31.22 38.46,31.67 ANT1.1 38.31,32.44 36.99,32.44 34.94,30.38 34.94,30.15 C22.1
SCL/2.4C  (via drill 0.15)
  Top 0.152: U1.P$M2 32.21,22.84 v31.66,23.39 | R4.2 30.36,25.78 v30.46,25.69 | v27.01,20.02 27.01,16.59 27.55,16.06 27.7,16.06 IC1.B1 | v23.35,22.69 23.81,22.69 IC3.12 | v39.28,18.04 38.67,17.43 38.59,17.43 R17.2 | v42.56,5.69 42.18,5.31 41.87,5.31 U3.7 | v6.59,5.16 6.59,3.79 TP_SCL.TP
  Route2 0.152: v31.66,23.39 31.46,23.59 31.46,25.59 31.36,25.69 v30.46,25.69
  Bottom 0.152: v27.01,20.02 27.01,23.45 27.05,23.49 | 27.05,23.49 29.22,25.66 30.44,25.66 v30.46,25.69 | 27.05,23.49 26.48,24.06 25.95,24.06 25.72,23.83 24.5,23.83 v23.35,22.69 23.13,22.46 23.13,20.63 20.08,17.58 16.88,17.58 6.59,7.3 v6.59,5.16 | v31.66,23.39 32.04,23.3 32.27,23.3 32.65,23.68 32.65,24.29 33.64,25.28 37.83,25.28 39.89,23.22 39.89,20.1 39.28,19.49 v39.28,18.04 42.63,14.69 42.63,14.08 42.56,14 v42.56,5.69
SDA/2.4C  (via drill 0.15)
  Top 0.152: U1.P$L1 32.06,23.53 v32.06,23.99 | v31.16,22.09 v31.17,22.1 R1.2 31.13,23.14 30.29,23.14 29.38,24.06 26.63,24.06 v26.25,23.68 | R18.2 43.93,6.23 42.25,6.23 41.87,5.85 U3.8 41.8,5.85 v41.34,6.3 | 27.58,15.56 27.32,15.3 27.32,13.54 30.52,10.34 TP_SDA.TP 30.67,10.27 31.51,9.43 v31.81,9.43 | 27.58,15.56 27.62,15.6 27.7,15.6 IC1.C1 | v23.58,21.32 23.81,21.55 23.96,21.55 24.34,21.93 24.34,22.08 IC3.2 | v24.65,20.25 24.65,18.5 27.58,15.56
  Route15 0.152: v32.06,23.99 32.06,22.29 31.86,22.09 v31.16,22.09
  Bottom 0.152: v24.65,20.25 v23.58,21.32 23.66,21.32 26.02,23.68 v26.25,23.68 | v41.34,6.3 34.94,6.3 v31.81,9.43
SWDCLK  (via drill 0.35)
  Top 0.152: TP_SWDIO.TP 37.83,15.36 v38.16,15.69 | U1.P$AA24 v41.26,20.59 | J2.4 18.99,11.92 v18.36,11.29 | TP_SWDIO.TP 37.83,13.76 v36.56,12.49 | TP_SWDCLK.TP 42.33,11.41 40.04,13.7 37.83,13.7 TP_SWDIO.TP
  Route15 0.152: v38.16,15.69 41.26,18.79 v41.26,20.59 | v18.36,11.29 18.36,10.39 18.26,10.29 18.26,6.39 21.56,6.39 25.26,10.09 34.16,10.09 v36.56,12.49
SWDIO  (via drill 0.35)
  Top 0.152: J2.2 18.06,12.29 v18.06,15.89 | U1.P$AC24 v40.56,20.09
  Route15 0.152: v18.06,15.89 18.36,16.19 26.06,16.19 28.36,18.49 39.96,18.49 40.56,19.09 v40.56,20.09
SWO  (via drill 0.15, 0.35)
  Top 0.152: U1.P$AD22 38,19.73 v38.46,20.19 | TP_SWO.TP 42.12,17.25 41.86,16.99 41.66,16.99 v41.56,17.09
  Route2 0.152: v38.46,20.19 v41.56,17.09
VBAT/1.2A
  Top 0.3: 39.36,4.78 38.29,3.71 38.06,3.71 C27.2 | 39.36,4.78 39.81,4.78 U3.3 39.89,4.93 39.89,5.24 U3.2 | 39.36,4.78 39.28,4.86 39.28,5.39 37.3,7.37 37.3,7.75 35.77,9.28 TP_VBAT.TP
VBAT/2.5C  (via drill 0.35)
  Top 0.203: IC1.C2 28.83,15.62 v29.06,15.39
  Top 0.4: C37.2 35.12,17.15 v35.06,17.09
  Route2 0.4: v29.06,15.39 33.36,15.39 v35.06,17.09
VBUS/1.5D  (via drill 0.15, 0.35)
  Top 0.254: C42.1 33.81,32.27 33.79,32.29
  Top 0.3: C43.1 27.09,25.36 27.09,26.04 26.78,26.34 v26.66,26.49 | 33.79,32.29 D3.5 33.64,32.29 33.34,32.29 v32.58,31.53
  Top 0.4: J4.A9_B4 21.83,26.52 v21.86,26.49 | J4.A4_B9 26.63,26.52 v26.66,26.49
  Route2 0.3: v32.58,31.53 28.92,27.87 28.38,27.87 27.09,26.57 26.78,26.57 v26.66,26.49
  Route2 0.4: v21.86,26.49 v26.66,26.49
VBUS/2.6D  (via drill 0.35)
  Top 0.254: v28.16,17.19 IC1.A2
  Top 0.3: C38.2 31.05,19.41 28.92,17.28 28.31,17.28 v28.16,17.19
  Top 0.4: U1.P$AD2 32.94,19.52 C38.2 | C21.1 v25.07,12.68 v25.06,12.69
  Route2 0.4: v28.16,17.19 25.06,14.09 v25.06,12.69
VREG  (via drill 0.35)
  Top 0.203: IC1.B2 29.39,16.02
  Top 0.254: 29.39,16.02 v29.46,16.09
  Top 0.3: C23.2 41.87,19.49 42.02,19.49 42.71,20.17 42.71,20.63 42.94,20.86 43.7,20.86 44.31,20.25 C24.2 44.39,20.1 44.39,17.73 44.54,17.58 44.54,16.74 43.39,15.6 42.86,15.6 41.57,14.31 40.35,14.31 38.37,16.29 37.38,16.29 35.17,14.08 TP_VREG.TP | 24.19,16.77 24.19,20.48 24.42,20.71 24.73,20.71 25.87,21.85 25.87,21.93 27.62,23.68 28.08,23.68 28.69,23.07 28.69,22.84 IC9.A1
  Top 0.4: TP_VREG.TP 34.2,13.95 33.66,14.49 v33.56,14.49 | C39.2 24.19,16.77 24.44,16.77 v24.46,16.79 | IC9.A1 IC9.A2 IC9.A3
  Route2 0.4: v24.46,16.79 25.66,16.79 26.86,17.99 29.06,17.99 29.46,17.59 v29.46,16.09
  Route15 0.4: v29.46,16.09 30.36,15.19 30.36,14.49 v33.56,14.49